# Altium PCB PCB1.PcbDoc
Units mm, origin at the board's own origin, x right, y up, seen from the top; angles counter-clockwise.
Board outline 69 x 76 mm, 2 copper layers (Top Layer, Bottom Layer); 26 components, 18 nets, 79 pads, 1 vias.
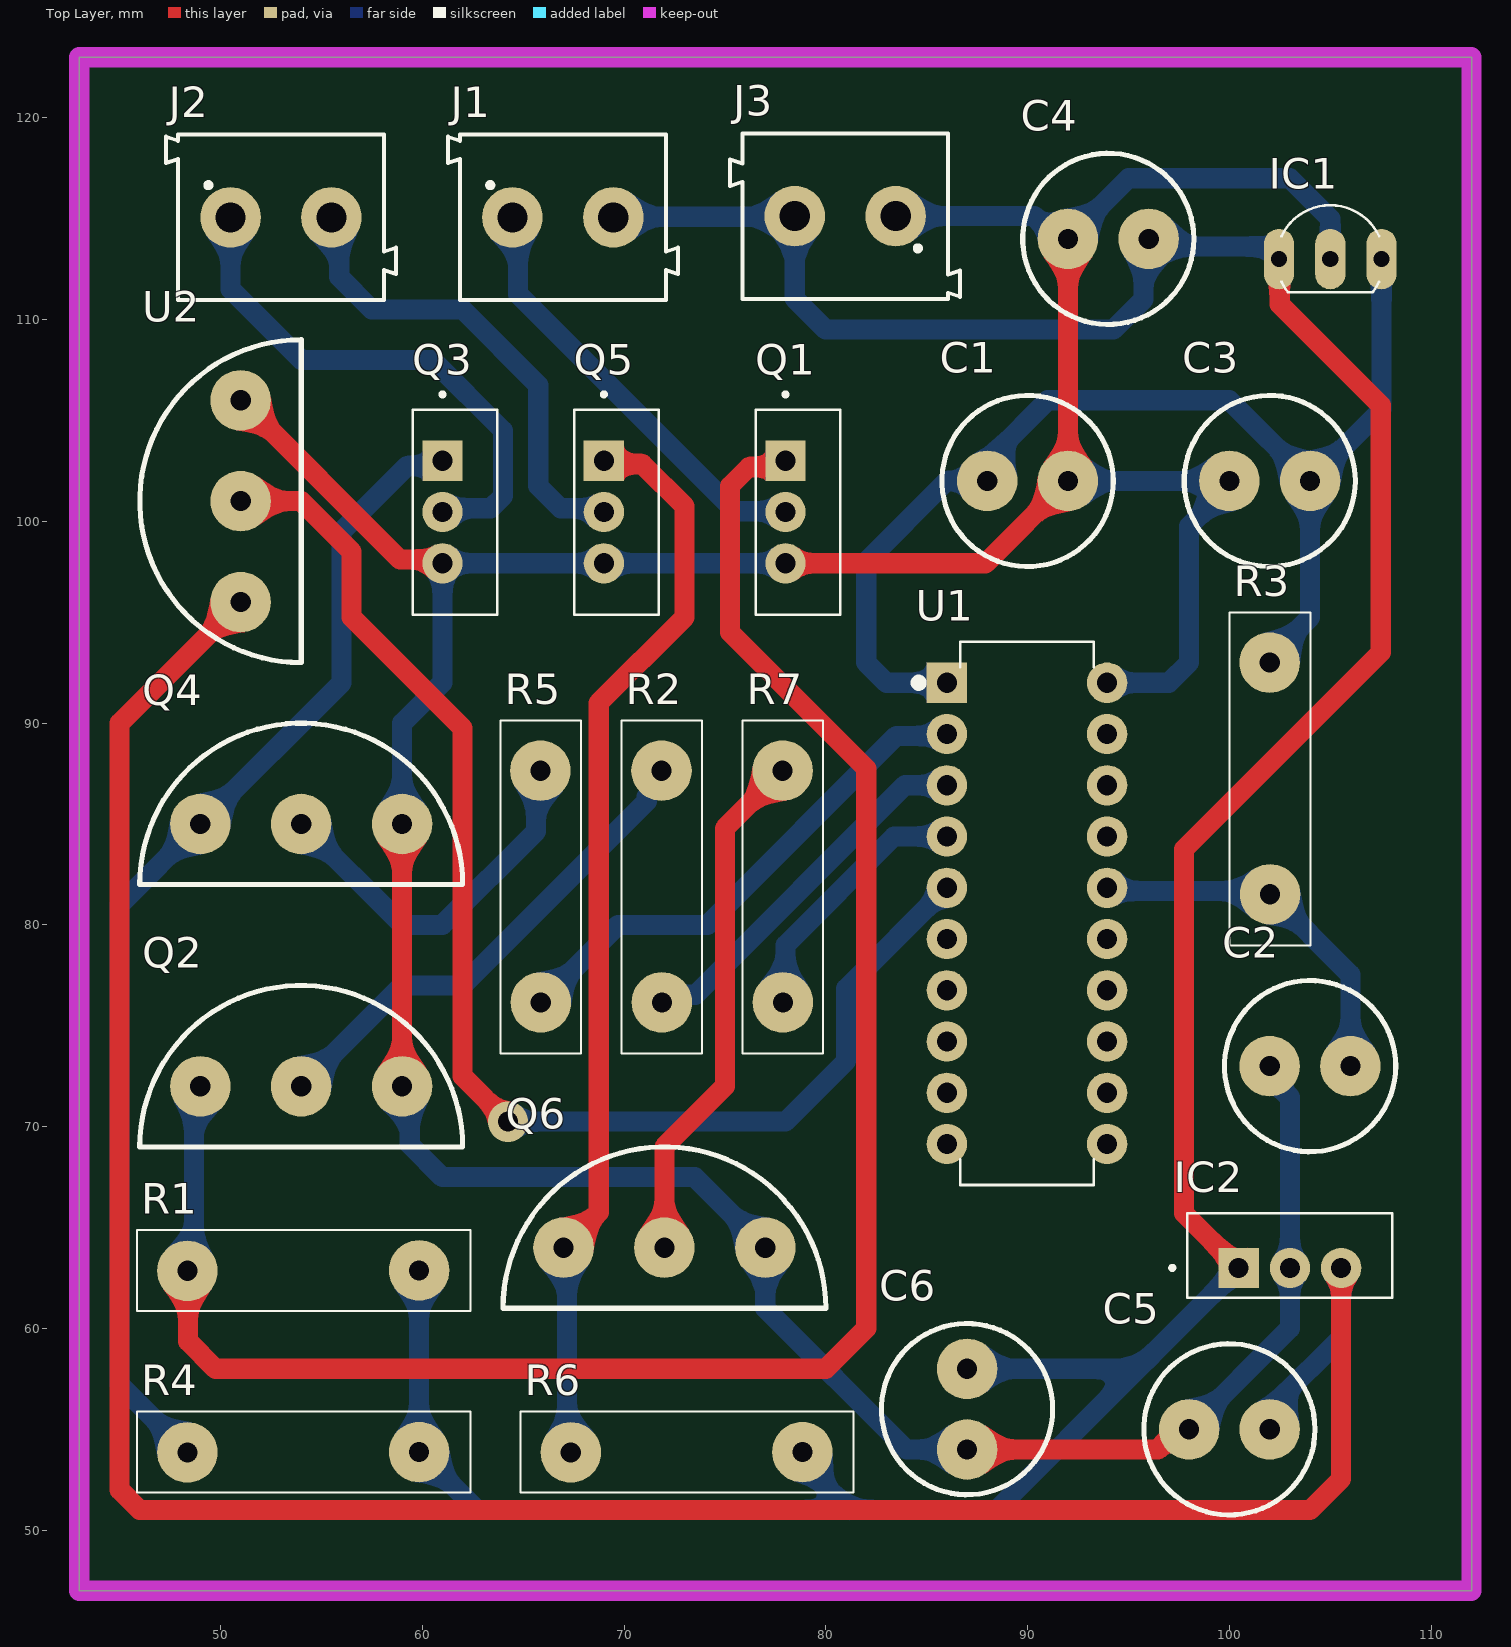
[diagram p0: Top Layer view]
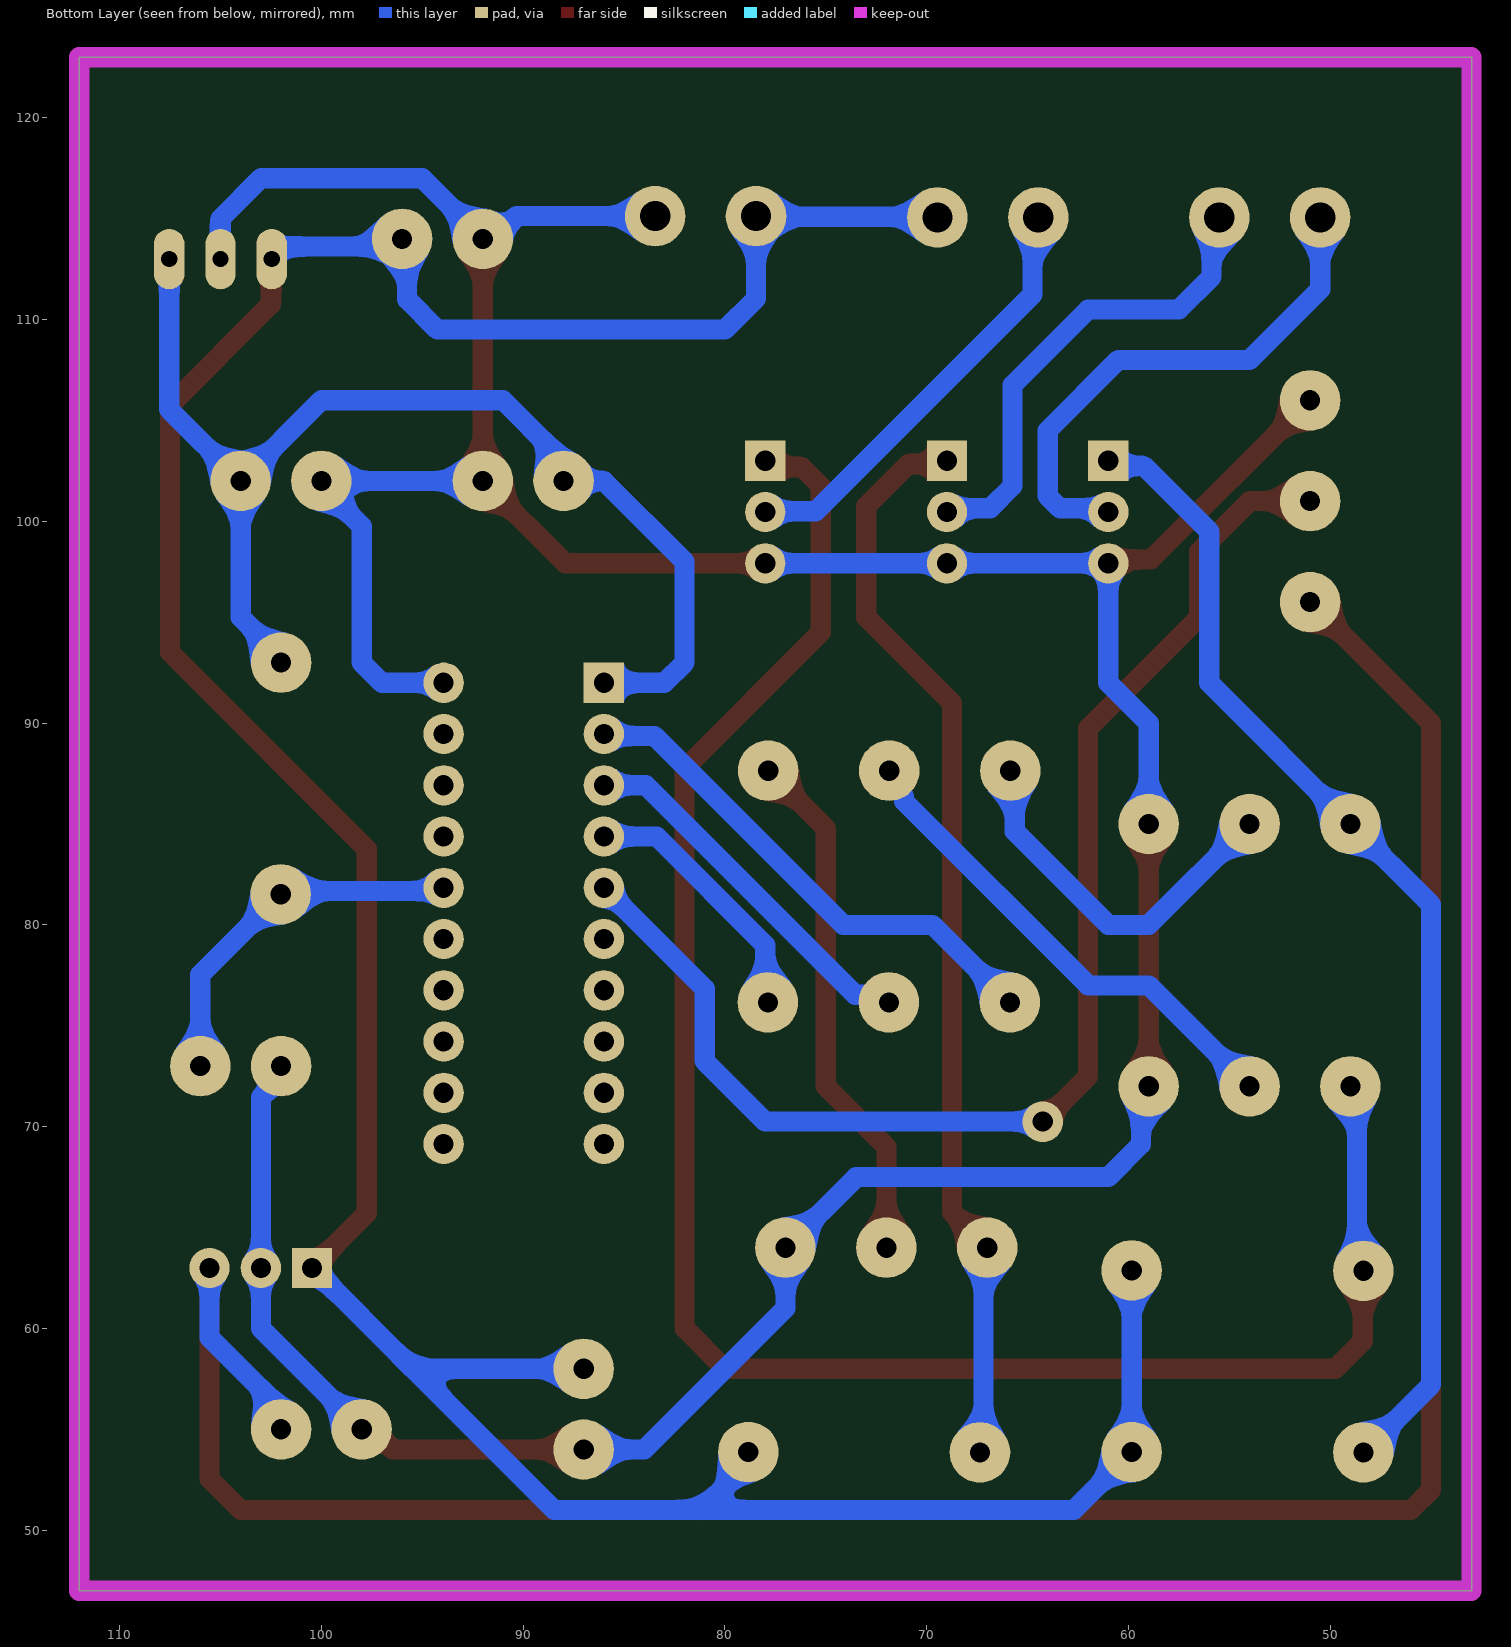
[diagram p1: Bottom Layer view, seen from below]
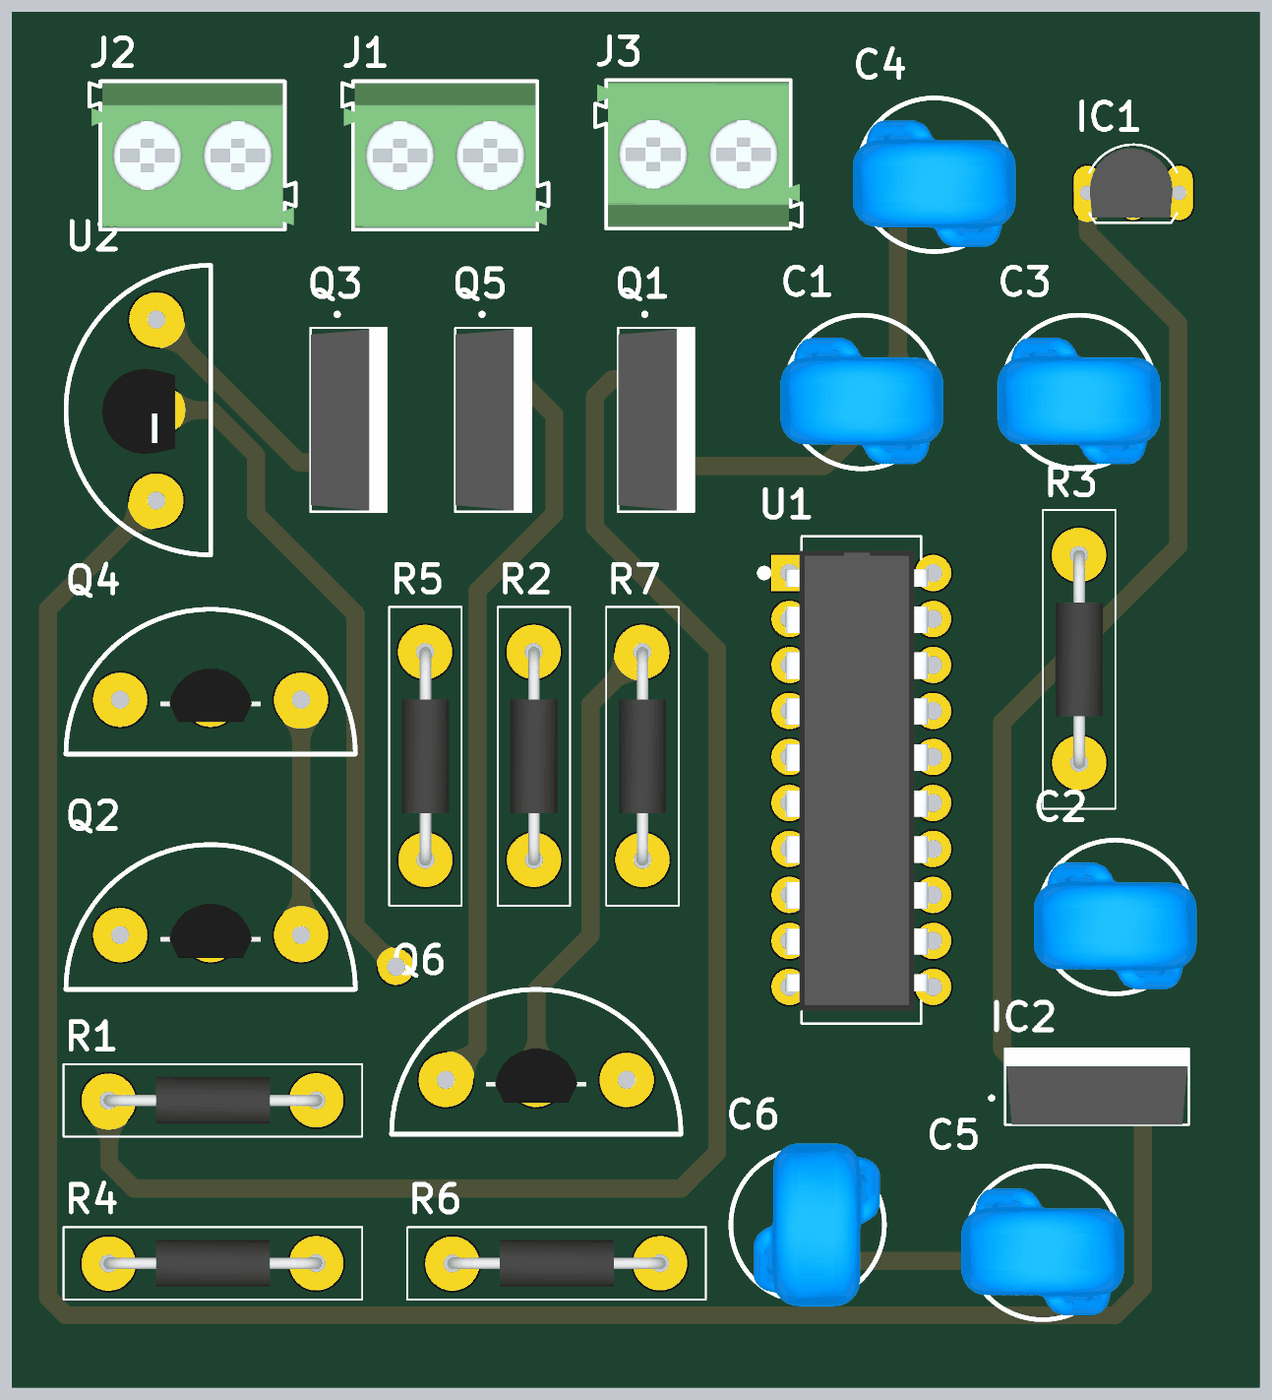
[diagram p2: 3D render of the assembled board from above, using the file's embedded part models]

## Layer stack, top to bottom
Top Solder: solder mask 0.0102, Solder Resist, Dk 3.5
Top Layer: signal copper 0.0356
Dielectric 1: dielectric 0.32, FR-4, Dk 4.8
Bottom Layer: signal copper 0.0356
Bottom Solder: solder mask 0.0102, Solder Resist, Dk 3.5

## Board outline
43,47 112,47 112,123 43,123

## Design rules (kind name [scope] priority, off if disabled: settings)
Clearance [All] p1: gap=0.254 ignorepadtopadclearanceinfootprint=FALSE except(0: Arc-Hole Track-Hole SMDPad-Hole THPad-Hole Via-Hole Fill-Hole Poly-Hole Region-Hole Text-Hole)
PolygonConnect [All] p1: connectstyle=Relief reliefconductorwidth=0.254 reliefentries=4 polygonreliefangle="90 Angle" airgapwidth=0.254
RoutingVias [All] p1: holewidth=1 width=2 viastyle="Through Hole" minholewidth=0.711 minwidth=1 maxholewidth=2 maxwidth=3
SolderMaskExpansion [All] p1: expansion=0.102 istentingtop=FALSE
Width [All] p1: maxlimit=3 minlimit=0.254 preferedwidth=1 minimp=50.000000 maximp=50.000000 favimp=50.000000
30 further rules are at their usual default settings.

## Components (designator, comment, footprint, x,y, rotation, side; value= is the part's Value field where it differs from the comment)
C1 "100nF Cap" Capacitor 88,102 r0 top
C2 "1nF Cap" Capacitor 102,73 r0 top
C3 "0.1uF Cap" Capacitor 100,102 r0 top
C4 "0.33uF Cap" Capacitor 92,114 r0 top
C5 "0.1uF Cap" Capacitor 98,55 r0 top
C6 "0.33uF Cap" Capacitor 87,54 r90 top
IC1 "L78L Series 100 mA 3.3 V Positive Voltage Regulator Through Hole - TO-92" L78L33 105,113 r180 top
IC2 "LM78XX Series 5 V Fixed Output 1 A 3-Terminal LDO Voltage Regulator - TO-220" LM7805 103,63 r0 top
J1 "Klemens" Klemens 66.929,115.189 r0 top
J2 "Klemens" Klemens 52.959,115.189 r0 top
J3 "Klemens" Klemens 81,115 r180 top
Q1 "MOSFET, Power; N-Ch; VDSS 55V; RDS(ON) 17.5 Milliohms; ID 49A; TO-220AB; PD 94W; -55deg" IRFZ44N 78,101 r270 top
Q2 "Trans GP BJT NPN 45V 0.1A 500mW Automotive 3-Pin TO-92 Ammo" BC547 54,72 r0 top
Q3 "MOSFET, Power; N-Ch; VDSS 55V; RDS(ON) 17.5 Milliohms; ID 49A; TO-220AB; PD 94W; -55deg" IRFZ44N 61,101 r270 top
Q4 "Trans GP BJT NPN 45V 0.1A 500mW Automotive 3-Pin TO-92 Ammo" BC547 54,85 r0 top
Q5 "MOSFET, Power; N-Ch; VDSS 55V; RDS(ON) 17.5 Milliohms; ID 49A; TO-220AB; PD 94W; -55deg" IRFZ44N 69,101 r270 top
Q6 "Trans GP BJT NPN 45V 0.1A 500mW Automotive 3-Pin TO-92 Ammo" BC547 72,64 r0 top
R1 "10kOhm Res" Res 54,63 r180 top
R2 "10kOhm Res" Res 72,82 r90 top
R3 "47kOhm Res" Res 102.143,87.36 r90 top
R4 "10kOhm Res" Res 54,54 r180 top
R5 "10kOhm Res" Res 66,82 r90 top
R6 "10kOhm Res" Res 73,54 r180 top
R7 "10kOhm Res" Res 78,82 r90 top
U1 "16 MHz MCU with 16KB Flash, 512B SRAM, comparator, UART/SPI/I2C, timer 20-PDIP -40 to 85" MSP430G2553 90,82 r0 top
U2 "Temperature Sensor Analog, Local 0°C ~ 100°C 10mV/°C TO-92-3" LM35 51,101 r90 top

## Footprints (in the part's own frame and the unit in brackets; to place one, negate y for a bottom-side part, rotate by r counter-clockwise, add the part's x,y. Pads: shape width x height; smd on the part's side, far side on the other; paste and mask are expansions set on the pad)
BC547 [mm]
  round 3 hole 1: 1(-5,0) 2(0,0) 3(5,0)
  silkscreen extent -8,-3 8,5, body extent -2.77,-1.25 2.77,1.75, height 7.58
Capacitor [mm]
  round 3 hole 1: 0(0,0) 1(4,0)
  silkscreen extent -2.24,-4.24 6.24,4.24, body extent -2.5,-4 6.5,3, height 12
IRFZ44N [mm]
  rect 1.995x1.995 / inner round 1.995 / far side rect 1.995x1.995 hole 1: 1(-2,0)
  round 1.995 hole 1: 2(0.54,0) 3(3.08,0)
  silkscreen extent -5.39,-1.48 5.62,2.72, body extent -4.54,-1.47 5.62,2.72, height 22.86
Klemens [mm]
  round 3 hole 1.5: 1(-2.46,-0.127) 2(2.54,-0.127)
  silkscreen extent -5.66,-4.23 5.74,3.97, body extent -5.56,-4.13 5.64,3.87, height 12.35
L78L33 [mm]
  oval 1.5x3 hole 0.813: 1(-2.54,0) 2(0,0) 3(2.54,0)
  silkscreen extent -2.42,-2.67 2.42,1.65, body extent -2.17,-2.46 2.39,1.37, height 7.44
LM35 [mm]
  round 3 hole 1: 1(-5,0) 2(0,0) 3(5,0)
  silkscreen extent -8,-3 8,5, body extent -2.54,-1.06 2.54,3, height 8.34
LM7805 [mm]
  rect 1.995x1.995 / inner round 1.995 / far side rect 1.995x1.995 hole 1: 1(-2.54,0)
  round 1.995 hole 1: 2(0,0) 3(2.54,0)
  silkscreen extent -5.93,-1.48 5.08,2.72, body extent -5.08,-1.47 5.08,2.72, height 22.86
MSP430G2553 [mm]
  rect 2x2 hole 1: 0(-4,10)
  round 2 hole 1: 1(-4,7.46) 2(-4,4.92) 3(-4,2.38) 4(-4,-0.16) 5(-4,-2.7) 6(-4,-5.24) 7(-4,-7.78) 8(-4,-10.32) 9(-4,-12.86) 10(3.94,-12.86) 11(3.94,-10.32) 12(3.94,-7.78) 13(3.94,-5.24) 14(3.94,-2.7) 15(3.94,-0.16) 16(3.94,2.38) 17(3.94,4.92) 18(3.94,7.46) 19(3.94,10)
  silkscreen extent -5.6,-14.89 3.27,12.03, body extent -4.22,-14.16 3.66,11.24, height 5.08
Res [mm]
  round 3 hole 1: 1(-5.842,0.127) 2(5.64,0.143)
  silkscreen extent -8.38,-1.87 8.13,2.13, body extent -6.16,-1.17 5.9,1.43, height 2.62

## Part data
IC1: library part L78L33, Case/Package=TO-92, Dropout Voltage=1.7V, Manufacturer=STMicroelectronics, Manufacturer Part Number=L78L33ACZ, Max Operating Temperature=125°C, Max Output Current=100mA, Max Supply Current=6mA, Max Input Voltage=30V, Min Operating Temperature=0°C, Min Output Voltage=3.3V, Min Input Voltage=5.3V, Package Quantity=2500, Power Supply Rejection Ratio (PSRR)=49dB, Supplier Part Number 1=511-L78L33ACZ, Accuracy=4%, Category="Voltage Regulators - Linear", ComponentLink1Description=https://datasheet.ciiva.com/2043/cd00000446-2043681.pdf?src-supplier=Digi-Key, ComponentLink1URL=https://datasheet.ciiva.com/2043/cd00000446-2043681.pdf?src-supplier=Digi-Key, componentlink2description=https://datasheet.ciiva.com/1511/1868798-1511961.pdf?src-supplier=Element14, componentlink2url=https://datasheet.ciiva.com/1511/1868798-1511961.pdf?src-supplier=Element14, ComponentLink3Description=https://datasheet.ciiva.com/16425/cd00000446-16425913.pdf?src-supplier=Future+Electronics, ComponentLink3URL=https://datasheet.ciiva.com/16425/cd00000446-16425913.pdf?src-supplier=Future+Electronics, ComponentLink4Description=https://datasheet.ciiva.com/4882/cd00000446-4882938.pdf?src-supplier=Mouser, ComponentLink4URL=https://datasheet.ciiva.com/4882/cd00000446-4882938.pdf?src-supplier=Mouser, Height=4.95mm, Lead Free="Lead Free", Length=4.95mm, Mount="Through Hole", Nominal Output Voltage=3.3V, Number of Outputs=1, Number of Pins=3, Number of Regulators=1, Output Configuration=Positive, Output Current=100mA, Output Type=Fixed, Output Voltage=3.3V, Packaging=Bulk, Polarity=Positive, Pricing 1="1=0,54, 10=0,401, 50=0,401, 100=0,271, 1000=0,168, 10000=0,142 (USD)", Quiescent Current=6mA, Reach SVHC Compliant=No, RoHS=Yes, RoHS Compliant=Yes, Series=-, Stock 1=19573, Supplier 1=Mouser, Width=3.94mm
IC2: library part LM7805, Case/Package=TO-220, Current Rating=1A, Dropout Voltage=2V, Manufacturer="ON Semiconductor / Fairchild", Manufacturer Part Number=LM7805CT, Max Operating Temperature=125°C, Max Output Current=2.2A, Max Output Voltage=5.2V, Max Input Voltage=35V, Min Operating Temperature=-40°C, Min Output Voltage=5V, Min Input Voltage=10V, Package Quantity=50, Quiescent Current=8mA, Accuracy=4%, Category="Voltage Regulators - Linear", ComponentLink1Description=https://datasheet.ciiva.com/19456/786138-19456361.pdf?src-supplier=Jameco, ComponentLink1URL=https://datasheet.ciiva.com/19456/786138-19456361.pdf?src-supplier=Jameco, componentlink2description=https://datasheet.ciiva.com/1512/1855686-1512105.pdf?src-supplier=Element14, componentlink2url=https://datasheet.ciiva.com/1512/1855686-1512105.pdf?src-supplier=Element14, ComponentLink3Description=https://datasheet.ciiva.com/1512/1855686-1512106.pdf?src-supplier=Element14, ComponentLink3URL=https://datasheet.ciiva.com/1512/1855686-1512106.pdf?src-supplier=Element14, ComponentLink4Description=https://datasheet.ciiva.com/1511/1855686-1511835.pdf?src-supplier=Element14, ComponentLink4URL=https://datasheet.ciiva.com/1511/1855686-1511835.pdf?src-supplier=Element14, ComponentLink5Description=https://datasheet.ciiva.com/8239/lm7812-8239478.pdf?src-supplier=Avnet, ComponentLink5URL=https://datasheet.ciiva.com/8239/lm7812-8239478.pdf?src-supplier=Avnet, ComponentLink6Description=https://datasheet.ciiva.com/17332/lm7805-17332792.pdf?src-supplier=Future+Electronics, ComponentLink6URL=https://datasheet.ciiva.com/17332/lm7805-17332792.pdf?src-supplier=Future+Electronics, ComponentLink7Description=https://datasheet.ciiva.com/2039/lm7805-2039365.pdf?src-supplier=Digi-Key, ComponentLink7URL=https://datasheet.ciiva.com/2039/lm7805-2039365.pdf?src-supplier=Digi-Key, ComponentLink8Description=https://datasheet.ciiva.com/48694/001253095-da-01-en-ic-reg-ldo-5v-1a-lm7805ct-to-220-3-fsc-48694790.pdf?src-supplier=Conrad, ComponentLink8URL=https://datasheet.ciiva.com/48694/001253095-da-01-en-ic-reg-ldo-5v-1a-lm7805ct-to-220-3-fsc-48694790.pdf?src-supplier=Conrad, Height=9.4mm, Lead Free="Lead Free", Length=10.67mm, Mount="Through Hole", Nominal Output Voltage=5V, Number of Outputs=1, Number of Pins=3, Number of Regulators=1, Output Current=1A, Output Type=Fixed, Output Voltage=5V, Packaging=Rail/Tube, Polarity=Positive, Pricing 1="207=1,4208, 210=1,3824, 420=1,344, 1100=1,3056, 2100=1,2672, 11000=1,2288, 21000=1,1904 (USD)", Reach SVHC Compliant=No, RoHS=Yes, RoHS Compliant=Yes, Series=-, Stock 1=120242, Supplier 1=Avnet, Supplier Part Number 1=LM7805CT, Weight=1.214g, Width=4.83mm
Q1 Q3 Q5: library part IRFZ44N, Continuous Drain Current (ID)=49A, Gate to Source Voltage (Vgs)=20V, Manufacturer="International Rectifier", Max Operating Temperature=175°C, Min Operating Temperature=-55°C, Supplier Part Number 1=3713894, Fall Time=165ns, Manufacturer Part Number=IRFZ44N, Mount="Through Hole", Number of Pins=3, Rise Time=185ns, RoHS=No, RoHS Compliant=No, Supplier 1=Rs, Turn-Off Delay Time=85ns, Turn-On Delay Time=19ns
Q2 Q4 Q6: library part BC547B, Case/Package=TO-92-3, Collector Base Voltage (VCBO)=50V, Collector Emitter Breakdown Voltage=45V, Collector Emitter Saturation Voltage=300mV, Collector-emitter Voltage-Max=600mV, Current Rating=100mA, Emitter Base Voltage (VEBO)=6V, Manufacturer="ON Semiconductor / Fairchild", Max Frequency=300MHz, Max Operating Temperature=150°C, Max Power Dissipation=500mW, Min Operating Temperature=-65°C, Package Quantity=5000, Supplier Part Number 1=1017673, Voltage=40V, Category=BJTs, Collector Emitter Voltage (VCEO)=45V, ComponentLink1Description=https://datasheet.ciiva.com/17011/bc547-17011404.pdf?src-supplier=Future+Electronics, ComponentLink1URL=https://datasheet.ciiva.com/17011/bc547-17011404.pdf?src-supplier=Future+Electronics, componentlink2description=https://datasheet.ciiva.com/985/bc546-547-548rev5-985523.pdf?src-supplier=Digi-Key, componentlink2url=https://datasheet.ciiva.com/985/bc546-547-548rev5-985523.pdf?src-supplier=Digi-Key, ComponentLink3Description=https://datasheet.ciiva.com/972/bc546-972262.pdf?src-supplier=Digi-Key, ComponentLink3URL=https://datasheet.ciiva.com/972/bc546-972262.pdf?src-supplier=Digi-Key, ComponentLink4Description=https://datasheet.ciiva.com/1195/1868820-1195464.pdf?src-supplier=Element14, ComponentLink4URL=https://datasheet.ciiva.com/1195/1868820-1195464.pdf?src-supplier=Element14, ComponentLink5Description=https://datasheet.ciiva.com/11197/bc550-11197769.pdf?src-supplier=Avnet, ComponentLink5URL=https://datasheet.ciiva.com/11197/bc550-11197769.pdf?src-supplier=Avnet, Contact Plating=Copper,Tin,Silver, Gain Bandwidth Product=100MHz, Height=4.58mm, hFE Min=200, Lead Free="Lead Free", Length=4.58mm, Manufacturer Part Number=BC547B, Max Breakdown Voltage=45V, Max Collector Current=100mA, Mount="Through Hole", Number of Pins=3, Packaging=Bulk, Polarity=NPN, Pricing 1="5=0,442, 10=0,327, 100=0,188, 500=0,127, 1000=0,078, 5000=0,0764 (EUR)", Reach SVHC Compliant=No, RoHS=Yes, RoHS Compliant=Yes, Series=-, Stock 1=265589, Supplier 1=Farnell, Transition Frequency=300MHz, Voltage Rating (DC)=45V, Weight=0.007055oz, Width=3.86mm
U1: library part MSP430G2553, Case/Package=N, Frequency=16MHz, Manufacturer="Texas Instruments", Manufacturer Part Number=MSP430G2553IN20, Max Operating Temperature=85°C, Max Supply Voltage=3.6V, Min Operating Temperature=-40°C, Min Supply Voltage=1.8V, Package Quantity=20, Supplier Part Number 1=595-MSP430G2553IN20, Category=Microcontrollers, ComponentLink1Description=https://datasheet.ciiva.com/28657/1695238-28657971.pdf?src-supplier=Element14, ComponentLink1URL=https://datasheet.ciiva.com/28657/1695238-28657971.pdf?src-supplier=Element14, Core Architecture=MSP430, Data Bus Width=16b, Height=5.08mm, Lead Free="Lead Free", Length=24.33mm, Max Frequency=16MHz, Memory Size=16KB, Memory Type=FLASH, Number of A/D Converters=8, Number of ADC Channels=8, Number of GPIO=24, Number of Pins=20, Number of Programmable I/O=16, Number of SPI Channels=2, Number of Timers/Counters=2, Number of UART Channels=1, Number of I2C Channels=1, Number of I/Os=16, Oscillator Type=Internal, Packaging=Rail/Tube, Peripherals="Brown-out Detect/Reset,POR,PWM,WDT,DMA", Pricing 1="1=3,45, 10=3,1, 50=3,1, 100=2,54, 1000=2,4, 10000=2,4 (USD)", Radiation Hardening=No, RAM Size=512B, Reach SVHC Compliant=No, RoHS=Yes, RoHS Compliant=Yes, Series=MSP430G2xx, Stock 1=886, Supplier 1=Mouser, Watchdog Timer=Yes, Width=6.35mm, Interface=I2C,SPI,IrDA,UART,USART,SCI,LIN
U2: library part LM35, Case/Package=TO-92, Manufacturer="TI National Semiconductor", Manufacturer Part Number=LM35DZ/NOPB, Max Operating Temperature=110°C, Max Supply Voltage=30V, Min Operating Temperature=-40°C, Min Supply Voltage=4V, Quiescent Current=56uA, Supplier Part Number 1=LM35DZ/NOPB-ND, Category="Integrated Circuits (ICs)", Height=5.2mm, Lead Free="Lead Free", Length=5.2mm, Mount="Through Hole", Number of Pins=3, Output=ANALOG, Output Type="Voltage,Analog Voltage,Analog", Packaging=Bulk, Pricing 1="1=2,52, 5=2,382, 10=2,042, 25=1,6336, 50=1,4976, 100=1,3615, 500=1,1913, 1000=1,05515, 5000=0,98707 (USD)", Reach SVHC Compliant=No, RoHS=Yes, RoHS Compliant=Yes, Series=-, Supplier 1=Digi-Key, Width=4.19mm, Interface=Analog

## Via types
v1: diameter 2, hole 1, Top Layer to Bottom Layer, 1 vias

## Nets (pads, with @x,y where several pads share a name; then routed paths per layer and width w, separated by ;. In a path a pad name is that pad's centre, name@x,y a point inside that pad or via, vN(x,y) a via of type N, cw(c..) or ccw(c..) an arc to the next point about the centre after c; other vN are vias at no path point)
3V3: C1.0 C3.1 IC1.1 R3.2 U1.0 | length 58.7
  Bottom Layer w1: U1.0 83,92 82,93 82,98 86,102 C1.0 ; C1.0@88.383,102.383 88.383,103.383 91,106 100,106 C3.1 ; R3.2 102,93.243 104,95.243 C3.1 ; IC1.1 107.54,105.54 C3.1
+5: C5.1 IC2.3 U2.1 | length 128
  Top Layer w1: U2.1 45,90 45,52 46,51 104,51 105.54,52.54 IC2.3
  Bottom Layer w1: C5.1 102.383,55.383 102.383,56.383 105.54,59.54 IC2.3
+12: C4.1 C6.1 IC1.3 IC2.1 J1.2 J3.2 R1.1 R4.1 R6.1 | length 167.2
  Top Layer w1: IC2.1 97.75,65.71 97.75,83.75 107.5,93.5 107.5,105.75 102.5,110.75 102.5,112.96 IC1.3
  Bottom Layer w1: R1.1 R4.1 62.715,51 81.174,51 ; J1.2 69.501,115.094 78.427,115.094 J3.2 78.46,111.04 80,109.5 94.25,109.5 95.75,111 95.75,113.75 C4.1 96.383,113.617 102.312,113.617 102.46,113.469 IC1.3 ; R6.1 78.842,53.332 81.174,51 ; C6.1 95.46,58 ; IC2.1 95.46,58 ; 81.174,51 88.46,51 95.46,58
BLED: R7.1 U1.3 | length 13.1
  Bottom Layer w1: R7.1 78,76.285 78,79 83.38,84.38 U1.3
Blue: J2.2 Q5.2 | length 24
  Bottom Layer w1: J2.2 55.882,114.679 55.882,112.118 57.5,110.5 62,110.5 65.75,106.75 65.75,101.75 66.85,100.65 68.81,100.65 Q5.2
GLED: R2.1 U1.2 | length 18.6
  Bottom Layer w1: R2.1 72.256,76.541 73.541,76.541 83.92,86.92 U1.2
GND: C1.1 C2.0 C3.0 C4.0 C5.0 C6.0 IC1.2 IC2.2 J3.1 Q1.3 Q2.3 Q3.3 Q4.3 Q5.3 Q6.3 U1.19 U2.3 | length 204.3
  Top Layer w1: U2.3 58.89,98.11 60.81,98.11 Q3.3 ; Q2.3 Q4.3 ; Q1.3 87.92,97.92 C1.1 C4.0 ; C6.0 96.459,54 97.459,55 C5.0
  Bottom Layer w1: Q2.3 59.383,71.617 59.383,69.117 61,67.5 73.5,67.5 Q6.3 77,61 84,54 C6.0 ; Q4.3 59,90 61,92 Q3.3 Q5.3 Q1.3 ; J3.1 90.332,115.127 91.459,114 C4.0 95,117 103,117 105,115 IC1.2 ; C1.1@92.383,101.617 C1.1 C3.0 100,101.757 98,99.757 98,93 97,92 U1.19 ; C5.0 103,60 IC2.2 103,71.459 102,72.459 C2.0
Green: J1.1 Q1.2 | length 21.6
  Bottom Layer w1: J1.1 64.75,114.781 64.75,111.25 75.502,100.498 77.962,100.498 Q1.2
LM35: U1.4 U2.2 | length 66.6
  Top Layer w1: U2.2 54,101 56.5,98.5 56.5,95.25 62,89.75 62,72.5 v1(64.25,70.25)
  Bottom Layer w1: v1(64.25,70.25) 78,70.25 81,73.25 81,76.84 U1.4
NetC2_1: C2.1 R3.1 U1.15 | length 18.4
  Bottom Layer w1: U1.15 94.101,81.679 101.855,81.679 R3.1 106,77.534 C2.1
NetQ1_1: Q1.1 Q2.1 R1.2 | length 95.7
  Top Layer w1: R1.2 48.393,62.823 48.393,59.357 49.75,58 80,58 82,60 82,87.75 75.25,94.5 75.25,101.75 76.192,102.692 77.692,102.692 Q1.1
  Bottom Layer w1: R1.2 48.68,63.177 48.68,71.68 Q2.1
NetQ2_2: Q2.2 R2.2 | length 24.8
  Bottom Layer w1: Q2.2 59,77 62,77 71.127,86.127 71.127,86.37 71.856,87.099 R2.2
NetQ3_1: Q3.1 Q4.1 R4.2 | length 58
  Bottom Layer w1: R4.2 45,57.216 45,81 Q4.1 56,92 56,99.5 59.25,102.75 60.75,102.75 Q3.1
NetQ4_2: Q4.2 R5.2 | length 18.7
  Bottom Layer w1: Q4.2 59,80 61,80 65.64,84.64 65.64,87.424 R5.2
NetQ5_1: Q5.1 Q6.1 R6.2 | length 54.5
  Top Layer w1: Q6.1 68.75,65.75 68.75,91 73,95.25 73,100.75 70.912,102.838 69.162,102.838 Q5.1
  Bottom Layer w1: Q6.1 67.18,63.82 67.18,54.036 R6.2
NetQ6_2: Q6.2 R7.2 | length 26.1
  Top Layer w1: Q6.2 72,69 75,72 75,84.784 R7.2
Red: J2.1 Q3.2 | length 26.5
  Bottom Layer w1: J2.1 50.499,111.501 54,108 60.5,108 64,104.5 64,101.25 63.4,100.65 61.19,100.65 Q3.2
RLED: R5.1 U1.1 | length 25.6
  Bottom Layer w1: R5.1 69.715,80 74.135,80 83.5,89.365 85.905,89.365 U1.1
pads on no net: U1.5 U1.6 U1.7 U1.8 U1.9 U1.10 U1.11 U1.12 U1.13 U1.14 U1.16 U1.17 U1.18

## Keep-outs
Keep-Out Layer:
  the board outline again, w1